# Altium PCB HBridgeMainBoard - Copy.PcbDoc (part 2 of 2)
Units mm, origin at the board's own origin, x right, y up, seen from the top; angles counter-clockwise.
Board outline 100 x 100 mm, 2 copper layers (Top Layer, Bottom Layer); 114 components, 99 nets, 368 pads, 0 vias.
Unrouted connection lines stored in the file: 258.
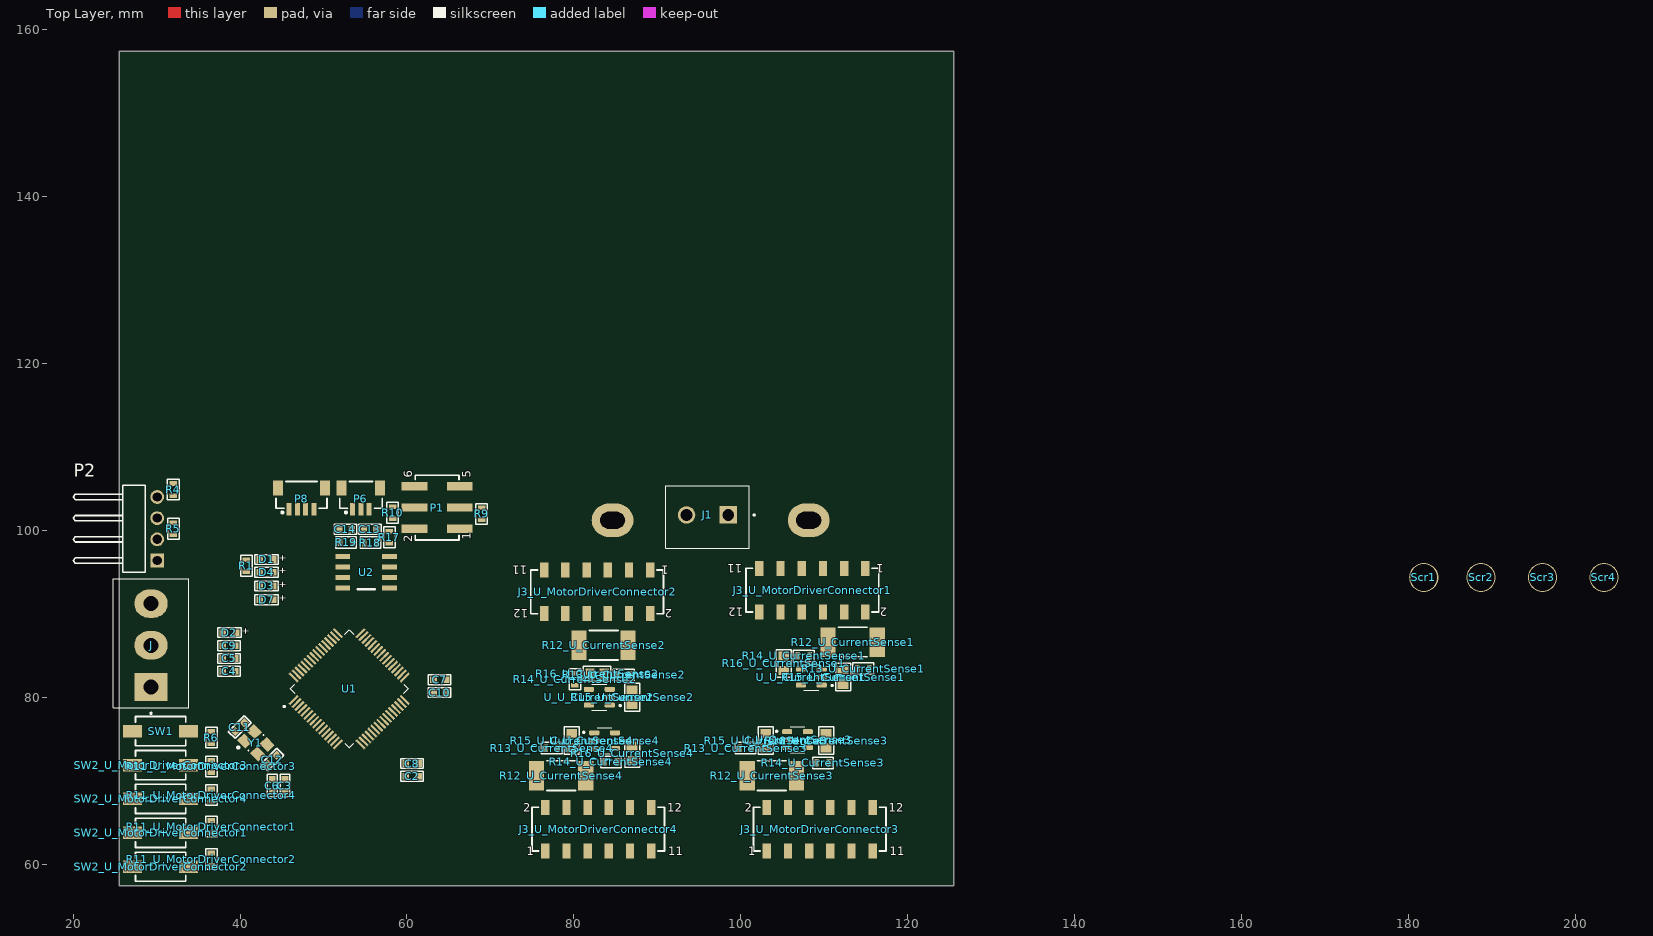
[diagram p0: Top Layer view]

## Part data (continued)
R13_U_CurrentSense1 R13_U_CurrentSense2 R13_U_CurrentSense3 R13_U_CurrentSense4 R14_U_CurrentSense1 R14_U_CurrentSense2 R14_U_CurrentSense3 R14_U_CurrentSense4: library part CMP-009-00278-1, "RES, size 0603, 2.2  KOhm, 1/4 W", Manufacture  Name=OEM, Rated Power="1/4 W", Resistance Tolerance=+/-1%, Component Type=Standard, ComponentLink1Description="Datasheet link", ComponentLink1URL=N/A, ComponentLink2Description="Supplier 1 URL", ComponentLink2URL=N/A, ComponentLink3Description="Supplier 2 URL", ComponentLink3URL=https://www.digikey.com/en/products/detail/yageo/RC0603FR-132K2L/13694214, ComponentLink4Description="Supplier 3 URL", ComponentLink4URL=N/A, Design Item ID=0006032221, Manufacture  SN=OEM, Mounting Technology=SMT, Pins=2, Size=0603, Source=Resistor_0603.SchLib, Supplier 1 Name=Mouser, Supplier 1 SN=603-SR0603FR-7T2K2L, Supplier 1 URL=https://www.mouser.vn/ProductDetail/YAGEO/SR0603FR-7T2K2L?qs=pfd5qewlna6SQQIuviAJZA%3D%3D, Supplier 2 Name=Digi-Key, Supplier 2 SN=13-RC0603FR-132K2LTR-ND, Supplier 2 URL=https://www.digikey.com/en/products/detail/yageo/RC0603FR-132K2L/13694214, Supplier 3 Name=thegioiic, Supplier 3 SN=N/A, Supplier 3 URL=N/A
R15_U_CurrentSense1 R15_U_CurrentSense2 R15_U_CurrentSense3 R15_U_CurrentSense4 R16_U_CurrentSense1 R16_U_CurrentSense2 R16_U_CurrentSense3 R16_U_CurrentSense4: library part CMP-009-00639-1, "RES, size 0805, 68 KOhm, 1/8W", Manufacture  Name=N/A, Rated Power="1/8 W", Resistance Tolerance=+/-1%, Component Type=Standard, ComponentLink1Description="Datasheet link", ComponentLink1URL=N/A, ComponentLink2Description="Supplier 1 URL", ComponentLink2URL=https://www.mouser.vn/ProductDetail/Vishay-Dale/CRCW080568K0JNTA?qs=nQS51YdobUZaOBJTD9nqEw%3D%3D, ComponentLink3Description="Supplier 2 URL", ComponentLink3URL=https://www.digikey.com/en/products/detail/yageo/RC0805JR-0768KL/728364, ComponentLink4Description="Supplier 3 URL", ComponentLink4URL=N/A, Design Item ID=0008056835, Manufacture  SN=N/A, Mounting Technology=SMT, Pins=2, Size=0805, Source=Resistor_0805.SchLib, Supplier 1 Name=Mouser, Supplier 1 SN=71-CRCW0805J-68K, Supplier 1 URL=https://www.mouser.vn/ProductDetail/Vishay-Dale/CRCW080568K0JNTA?qs=nQS51YdobUZaOBJTD9nqEw%3D%3D, Supplier 2 Name=Digi-Key, Supplier 2 SN=311-68KARTR-ND, Supplier 2 URL=https://www.digikey.com/en/products/detail/yageo/RC0805JR-0768KL/728364, Supplier 3 Name=Thegioiic, Supplier 3 SN=N/A, Supplier 3 URL=N/A
R18: library part CMP-009-00207-1, "RES, size 0603, 120 Ohm, 1/4 W", Manufacture  Name=OEM, Rated Power="1/4 W", Resistance Tolerance=+/-1%, Component Type=Standard, ComponentLink1Description="Datasheet link", ComponentLink1URL=https://www.yageo.com/upload/media/product/productsearch/datasheet/rchip/PYu-SR_20105_RoHS_L_10.pdf, ComponentLink2Description="Supplier 1 URL", ComponentLink2URL=N/A, ComponentLink3Description="Supplier 2 URL", ComponentLink3URL=https://www.digikey.com/en/products/detail/yageo/SR0603FR-7T120RL/9373099, ComponentLink4Description="Supplier 3 URL", ComponentLink4URL=N/A, Design Item ID=0006031211, Manufacture  SN=OEM, Mounting Technology=SMT, Pins=2, Size=0603, Source=Resistor_0603.SchLib, Supplier 1 Name=Mouser, Supplier 1 SN=603-SR0603FR-7T120RL, Supplier 1 URL=https://www.mouser.vn/ProductDetail/YAGEO/SR0603FR-7T120RL?qs=sGAEpiMZZMvdGkrng054tz1y1XEHv7sNpzSbq0ZWZmOggb8s%252BZMxlg%3D%3D, Supplier 2 Name=Digi-Key, Supplier 2 SN="YAG5825TR-ND YAG5825CT-ND YAG5825DKR-ND", Supplier 2 URL=https://www.digikey.com/en/products/detail/yageo/SR0603FR-7T120RL/9373099, Supplier 3 Name=thegioiic, Supplier 3 SN=N/A, Supplier 3 URL=N/A
R21_U_Protect1 R21_U_Protect2 R22_U_Protect1 R22_U_Protect2 R23_U_Protect1 R23_U_Protect2: library part CMP-009-00482-1, "RES, size 0805, 10 KOhm, 1/8 W", Manufacture  Name="Vishay Dale", Manufacture  SN=CRCW080515K0FKEAC, Rated Power="1/8 W", Resistance Tolerance=+/-1%, Component Type=Standard, ComponentLink1Description="Datasheet link", ComponentLink1URL=https://www.vishay.com/docs/28773/crcwce3.pdf, ComponentLink2Description="Supplier 1 URL", ComponentLink2URL=https://www.mouser.vn/ProductDetail/Vishay-Dale/CRCW080515K0FKEA?qs=bMjB6bAaLEM4rXT2DoR3BA%3D%3D, ComponentLink3Description="Supplier 2 URL", ComponentLink3URL=https://www.digikey.com/en/products/detail/vishay-dale/CRCW080515K0FKEAC/7928558, ComponentLink4Description="Supplier 3 URL", ComponentLink4URL=N/A, Design Item ID=0008051531, Mounting Technology=SMT, Pins=2, Size=0805, Source=Resistor_0805.SchLib, Supplier 1 Name=Mouser, Supplier 1 SN=71-CRCW0805-15K-E3, Supplier 1 URL=https://www.mouser.vn/ProductDetail/Vishay-Dale/CRCW080515K0FKEA?qs=bMjB6bAaLEM4rXT2DoR3BA%3D%3D, Supplier 2 Name=Digi-Key, Supplier 2 SN=541-4136-2-ND, Supplier 2 URL=https://www.digikey.com/en/products/detail/vishay-dale/CRCW080515K0FKEAC/7928558, Supplier 3 Name=Thegioiic, Supplier 3 SN=N/A, Supplier 3 URL=N/A
Scr1 Scr2 Scr3 Scr4: library part CMP-143-000000-1, Component Type=Standard, Design Item ID=MP3.2, Pin Count=1, Source=MP_3P2.SchLib
SW1 SW2_U_MotorDriverConnector1 SW2_U_MotorDriverConnector2 SW2_U_MotorDriverConnector3 SW2_U_MotorDriverConnector4: library part CMP-011-00107-1, "WS-TASV SMT Tact Switch, L6 x W3.5 x H4.3mm, 260g, SPST-NO, 12V, 50mA", Manufacturer="Wurth Elektronik", Operating Temperature Max=85°C, Operating Temperature Min=-40°C, Rated Current=50mA, Rated Voltage=12VDC, Category="Tact Switches", Circuit=SPST-NO, Component Type=Standard, Contact Material="Stainless Steel", Design Item ID=434111043826, Height=4.3mm, Length=6mm, Manufacturer Part Number=434111043826, Match Code=WS-TASV, Mount="Surface Mount", Operation Force=260g, Packaging="Tape and Reel", Pins=2, Source=Button.SchLib, Supplier 1 Name=Mouser, Supplier 1 SN=710-434111043826, Supplier 1 URL=https://www.mouser.vn/ProductDetail/Wurth-Elektronik/434111043826?qs=wr8lucFkNMW3koBfPj4qpQ%3D%3D, Supplier 2 Name=Digi-Key, Supplier 2 SN=732-7040-2-ND, Supplier 2 URL=https://www.digikey.com/en/products/detail/w%C3%BCrth-elektronik/434111043826/5209073, Supplier 3 Name=Thegioiic, Supplier 3 SN=N/A, Supplier 3 URL=N/A, Terminal Material="Copper Alloy", Terminal Plating=Silver, Washable=No, Width=3.5mm
U1: library part CMP-031-00016-5, "ARMÂ® CortexÂ®-M3 STM32F1 Microcontroller IC 32-Bit 72MHz 256KB (256K x 8) FLASH 64-LQFP (10x10)", Case/Package="LQFP-64 STMicroelectronics", Availability="In Stock", Check_prices=https://www.snapeda.com/parts/STM32F103RCT6/STMicroelectronics/view-part/?ref=eda, Component Type=Standard, Design Item ID=STM32F103RCT6, MF=STMicroelectronics, MP=STM32F103RCT6, Pins=64, Price=None, Purchase-URL=https://pricing.snapeda.com/search/part/STM32F103RCT6/?ref=eda, SnapEDA_Link=https://www.snapeda.com/parts/STM32F103RCT6/STMicroelectronics/view-part/?ref=snap, Source=STM32F103RCT6.SchLib
U2: library part CMP-016-000000-1, "1/1 Transceiver Half CANbus 8-SO", Package="SOIC-8 NXP Semiconductors", Availability="In Stock", Check_prices=https://www.snapeda.com/parts/TJA1050/NXP%20USA%20Inc./view-part/562764/?ref=eda, Design Item ID=TJA1050, MF="NXP USA", MP=TJA1050, Price=None, Purchase-URL=https://pricing.snapeda.com/search/part/TJA1050/?ref=eda, SnapEDA_Link=https://www.snapeda.com/parts/TJA1050/NXP%20USA%20Inc./view-part/562764/?ref=snap, Source=TJA1050.SchLib
U3: library part CMP-098-000070-1, "AMS1117-3.3V, OUT 3.3V 1A.", Current Input Maximum=N/A, Current Output Maximum=1A, Manufacturer=AMS, Voltage Input Maximum=15V, Voltage Output=3.3V, Component Type=Standard, ComponentLink1Description="Datasheet link", ComponentLink1URL=http://www.advanced-monolithic.com/pdf/ds1117.pdf, ComponentLink2Description="Supplier 1 URL", ComponentLink2URL=N/A, ComponentLink3Description="Supplier 2 URL", ComponentLink3URL=N/A, ComponentLink4Description="Supplier 3 URL", ComponentLink4URL=N/A, Design Item ID=AMS1117-3.3V, Manufacturer Part Number=N/A, Mounting Technology=SMD, Pad Count=4, Pin Count=4, Source=AMS_family.SchLib, Supplier 1 Name=Mouser, Supplier 1 SN=N/A, Supplier 1 URL=N/A, Supplier 2 Name=Digi-Key, Supplier 2 SN=N/A, Supplier 2 URL=N/A, Supplier 3 Name=thegioiic, Supplier 3 SN=N/A, Supplier 3 URL=https://www.thegioiic.com/ams1117-3-3v-ic-on-ap-3-3v-1a-sot-223
U_U_CurrentSense1 U_U_CurrentSense2 U_U_CurrentSense3 U_U_CurrentSense4: library part CMP-014-00080-5, "General Purpose Amplifier 1 Circuit Rail-to-Rail SOT-23-5", Case/Package="SOT-23 Microchip", Availability=Unavailable, Component Type=Standard, Design Item ID=MCP601T-I/OT, MF=Microchip, MP=MCP601T-I/OT, Pins=5, Price=None, SnapEDA_Link=https://www.snapeda.com/parts/MCP601T-I/OT/Microchip/view-part/43729/?ref=snap, Source=SnapEDAsch.SchLib
Y1: library part CMP-003-00057-1, "CRYSTAL 8.000MHZ 8PF SMD", Case/Package=NX3225SA, Frequency=25MHz, Load Capacitance=8pF, Manufacturer=NDK, Manufacturer Part Number=NX3225SA-25.000M-STD-CRS-2, Temperature="-40°C to +125°C", Temperature Range High=125°C, Temperature Range Low=-40°C, Tolerance=15ppm, Automotive=Yes, Automotive Grade="Grade 1", Category=Crys, Component Type=Standard, Design Item ID=CMP-200220-000002-1, Device Class L1="Passive Components", Device Class L2="Crystals / Oscillators", Device Class L3=Crystals, Digikey Description="CRYSTAL 25.0000MHZ 8PF SMD", Esr=100, Height=0.6mm, Lead Free=Yes, Octopart=https://octopart.com/nx3225sa-25.000m-std-crs-2-ndk-51374293, Pins=4, RoHS=TRUE, Series=NX3225SA, Source="Components - 28.03.25 - 23.15.SchLib"

## Nets (pads, with @x,y where several pads share a name; then routed paths per layer and width w, separated by ;. In a path a pad name is that pad's centre, name@x,y a point inside that pad or via, vN(x,y) a via of type N, cw(c..) or ccw(c..) an arc to the next point about the centre after c; other vN are vias at no path point)
3V3: C2.2 C3.2 C4.2 C5.2 C6.2 C7.2 C8.2 C9.2 C10.2 F4.1 J3_U_MotorDriverConnector1.2 J3_U_MotorDriverConnector2.2 J3_U_MotorDriverConnector3.2 J3_U_MotorDriverConnector4.2 P1.1 P1.2 P2.1 R2.2 R4.2 R5.2 R6.2 SW2_U_MotorDriverConnector1.2 SW2_U_MotorDriverConnector2.2 SW2_U_MotorDriverConnector3.2 SW2_U_MotorDriverConnector4.2 U1.13 U1.19 U1.32 U1.64
5V: C15.1 D5.A F3.0 J.2
5V_U_CurrentSense1: F3.1 U2.3 U_U_CurrentSense1.5 U_U_CurrentSense2.5 U_U_CurrentSense3.5 U_U_CurrentSense4.5
BOOT0: R9.1 U1.28
BOOT1: R10.1 U1.60
CAN_RX: U1.45 U2.4
CAN_TX: U1.44 U2.1
EN1_U_MotorDriverConnector1: J3_U_MotorDriverConnector1.7 U1.37
EN1_U_MotorDriverConnector2: J3_U_MotorDriverConnector2.7 U1.57
EN1_U_MotorDriverConnector3: J3_U_MotorDriverConnector3.7 U1.24
EN1_U_MotorDriverConnector4: J3_U_MotorDriverConnector4.7 U1.20
EN2_U_MotorDriverConnector1: J3_U_MotorDriverConnector1.5 U1.38
EN2_U_MotorDriverConnector2: J3_U_MotorDriverConnector2.5 U1.56
EN2_U_MotorDriverConnector3: J3_U_MotorDriverConnector3.5 U1.25
EN2_U_MotorDriverConnector4: J3_U_MotorDriverConnector4.5 U1.21
ENC_C1_U_MotorDriverConnector1: J3_U_MotorDriverConnector1.3 U1.41
ENC_C1_U_MotorDriverConnector2: J3_U_MotorDriverConnector2.3 U1.58
ENC_C1_U_MotorDriverConnector3: J3_U_MotorDriverConnector3.3 U1.22
ENC_C1_U_MotorDriverConnector4: J3_U_MotorDriverConnector4.3 U1.15
ENC_C2_U_MotorDriverConnector1: J3_U_MotorDriverConnector1.1 U1.42
ENC_C2_U_MotorDriverConnector2: J3_U_MotorDriverConnector2.1 U1.59
ENC_C2_U_MotorDriverConnector3: J3_U_MotorDriverConnector3.1 U1.23
ENC_C2_U_MotorDriverConnector4: J3_U_MotorDriverConnector4.1 U1.14
GND_U_Protect1: C1.1 C2.1 C3.1 C4.1 C5.1 C6.1 C7.1 C8.1 C9.1 C10.1 C11.1 C12.1 C13.1 C14.1 C15.2 C16.2 C17_U_Protect1.1 D3.1 D4.1 D7.1 D10_U_Protect1.C D11_U_Protect1.A J3_U_MotorDriverConnector1.8 J3_U_MotorDriverConnector2.8 J3_U_MotorDriverConnector3.8 J3_U_MotorDriverConnector4.8 J.1 P1.5 P1.6 P2.2 P6.3 P8.4 R1.1 R7.1 R8.1 R11_U_MotorDriverConnector1.1 R11_U_MotorDriverConnector2.1 R11_U_MotorDriverConnector3.1 R11_U_MotorDriverConnector4.1 R16_U_CurrentSense1.1 R16_U_CurrentSense2.1 R16_U_CurrentSense3.1 R16_U_CurrentSense4.1 R22_U_Protect1.1 R23_U_Protect1.1 SW1.1 U1.12 U1.18 U1.31 U1.47 U1.63 U2.2 U2.8 U3.1 U_U_CurrentSense1.2 U_U_CurrentSense2.2 U_U_CurrentSense3.2 U_U_CurrentSense4.2 Y1.2 Y1.4
GND_U_Protect2: C17.1 D10_U_Protect2.C D11_U_Protect2.A J1.1 J3_U_MotorDriverConnector1.10 J3_U_MotorDriverConnector1.12 J3_U_MotorDriverConnector2.10 J3_U_MotorDriverConnector2.12 J3_U_MotorDriverConnector3.10 J3_U_MotorDriverConnector3.12 J3_U_MotorDriverConnector4.10 J3_U_MotorDriverConnector4.12 R22_U_Protect2.1 R23_U_Protect2.1
NetC13_2: C13.2 P6.1 R17.2
NetC14_2: C14.2 P6.2 R19.2
NetC16_1: C16.1 D6.A R20.2 U3.2 U3.4
NetD1_1: D1.1 D2.1 R1.2
NetD3_2: D3.2 R2.1
NetD4_2: D4.2 R3.1
NetD5_K: D5.K U3.3
NetD7_2: D7.2 R20.1
NetD8_U_Protect1_A: D8_U_Protect1.A D10_U_Protect1.A
NetD8_U_Protect2_A: D8_U_Protect2.A D10_U_Protect2.A
NetD9_U_Protect1_A: D9_U_Protect1.A Q1_U_Protect1.1 R22_U_Protect1.2
NetD9_U_Protect1_K: D9_U_Protect1.K Q1_U_Protect1.2 Q2_U_Protect1.2 Q3_U_Protect1.2 R21_U_Protect1.2
NetD9_U_Protect2_A: D9_U_Protect2.A Q1_U_Protect2.1 R22_U_Protect2.2
NetD9_U_Protect2_K: D9_U_Protect2.K Q1_U_Protect2.2 Q2_U_Protect2.2 Q3_U_Protect2.2 R21_U_Protect2.2
NetD11_U_Protect1_K: D11_U_Protect1.K Q3_U_Protect1.1 R21_U_Protect1.1
NetD11_U_Protect2_K: D11_U_Protect2.K Q3_U_Protect2.1 R21_U_Protect2.1
NetP1_3: P1.3 R9.2
NetP1_4: P1.4 R10.2
NetP2_3: P2.3 R5.1 R8.2 U1.46
NetP2_4: P2.4 R4.1 R7.2 U1.49
NetQ2_U_Protect1_1: Q2_U_Protect1.1 Q3_U_Protect1.3 R23_U_Protect1.2
NetQ2_U_Protect2_1: Q2_U_Protect2.1 Q3_U_Protect2.3 R23_U_Protect2.2
NetR13_U_CurrentSense1_1: R13_U_CurrentSense1.1 R15_U_CurrentSense1.2 U_U_CurrentSense1.3
NetR13_U_CurrentSense2_1: R13_U_CurrentSense2.1 R15_U_CurrentSense2.2 U_U_CurrentSense2.3
NetR13_U_CurrentSense3_1: R13_U_CurrentSense3.1 R15_U_CurrentSense3.2 U_U_CurrentSense3.3
NetR13_U_CurrentSense4_1: R13_U_CurrentSense4.1 R15_U_CurrentSense4.2 U_U_CurrentSense4.3
NetR14_U_CurrentSense1_1: R14_U_CurrentSense1.1 R16_U_CurrentSense1.2 U_U_CurrentSense1.4
NetR14_U_CurrentSense2_1: R14_U_CurrentSense2.1 R16_U_CurrentSense2.2 U_U_CurrentSense2.4
NetR14_U_CurrentSense3_1: R14_U_CurrentSense3.1 R16_U_CurrentSense3.2 U_U_CurrentSense3.4
NetR14_U_CurrentSense4_1: R14_U_CurrentSense4.1 R16_U_CurrentSense4.2 U_U_CurrentSense4.4
NetR17_1: R17.1 R18.2 U2.7
NetR18_1: R18.1 R19.1 U2.6
OSC_IN: C11.2 U1.5 Y1.1
OSC_OUT: C12.2 U1.6 Y1.3
PA2: J3_U_MotorDriverConnector4.9 U1.16
PA3: J3_U_MotorDriverConnector4.11 U1.17
PA10: U1.43
PA15: U1.50
PB0: J3_U_MotorDriverConnector3.11 U1.26
PB1: J3_U_MotorDriverConnector3.9 U1.27
PB3: U1.55
PB8: J3_U_MotorDriverConnector2.9 U1.61
PB9: J3_U_MotorDriverConnector2.11 U1.62
PB10: R11_U_MotorDriverConnector4.2 SW2_U_MotorDriverConnector4.1 U1.29
PB11: R11_U_MotorDriverConnector3.2 SW2_U_MotorDriverConnector3.1 U1.30
PB12: R11_U_MotorDriverConnector1.2 SW2_U_MotorDriverConnector1.1 U1.33
PB13: R11_U_MotorDriverConnector2.2 SW2_U_MotorDriverConnector2.1 U1.34
PB14: D1.2 U1.35
PB15: D2.2 U1.36
PC0: R15_U_CurrentSense4.1 U1.8 U_U_CurrentSense4.1
PC1: R15_U_CurrentSense2.1 U1.9 U_U_CurrentSense2.1
PC2: R15_U_CurrentSense3.1 U1.10 U_U_CurrentSense3.1
PC3: R15_U_CurrentSense1.1 U1.11 U_U_CurrentSense1.1
PC8: J3_U_MotorDriverConnector1.11 U1.39
PC9: J3_U_MotorDriverConnector1.9 U1.40
PC10: P8.3 U1.51
PC11: P8.2 U1.52
PC12: P8.1 U1.53
PC13: U1.2
PC14: U1.3
PC15: R3.2 U1.4
PD2: U1.54
POWER3V3: D6.K F4.0
RESET: C1.2 R6.1 SW1.2 U1.7
VCC: F2.0 J.3
VCC_U_MotorDriverConnector1: J3_U_MotorDriverConnector1.4 J3_U_MotorDriverConnector2.4 J3_U_MotorDriverConnector3.4 J3_U_MotorDriverConnector4.4 Q2_U_Protect1.3
VDC: F1.0 J1.2
VDC_U_MotorDriverConnector1: J3_U_MotorDriverConnector1.6 R12_U_CurrentSense1.2 R14_U_CurrentSense1.2
VDC_U_MotorDriverConnector2: J3_U_MotorDriverConnector2.6 R12_U_CurrentSense2.2 R14_U_CurrentSense2.2
VDC_U_MotorDriverConnector3: J3_U_MotorDriverConnector3.6 R12_U_CurrentSense3.2 R14_U_CurrentSense3.2
VDC_U_MotorDriverConnector4: J3_U_MotorDriverConnector4.6 R12_U_CurrentSense4.2 R14_U_CurrentSense4.2
VDCIn_U_CurrentSense1: Q2_U_Protect2.3 R12_U_CurrentSense1.1 R12_U_CurrentSense2.1 R12_U_CurrentSense3.1 R12_U_CurrentSense4.1 R13_U_CurrentSense1.2 R13_U_CurrentSense2.2 R13_U_CurrentSense3.2 R13_U_CurrentSense4.2
Vin_U_Protect1: C17_U_Protect1.2 D8_U_Protect1.C F2.1 Q1_U_Protect1.3
Vin_U_Protect2: C17.2 D8_U_Protect2.C F1.1 Q1_U_Protect2.3
pads on no net: P6.MP1 P6.MP2 P8.MP1 P8.MP2 Scr1.1 Scr2.1 Scr3.1 Scr4.1 U1.1 U1.48 U2.5

## Silkscreen, mask and mechanical layers (free items; w line width, h text height)
Drill Guide:
  the board outline again, w0.254

## Text inside footprints (layer, text, board x,y; h text height)
C15: Bottom Overlay "+" at 36.203,78.584 h1.22 r270
C16: Bottom Overlay "+" at 37.203,87.532 h1.22 r90
D1: Top Overlay "+" at 45.466,96.266 h0.76 r90
D2: Top Overlay "+" at 41.021,87.503 h0.76 r90
D3: Top Overlay "+" at 45.466,93.091 h0.76 r90
D4: Top Overlay "+" at 45.466,94.742 h0.76 r90
D7: Top Overlay "+" at 45.466,91.44 h0.76 r90
J3_U_MotorDriverConnector1: Top Overlay "2" at 117.565,90.737 h1.02 r180; Top Overlay "1" at 117.165,95.937 h1.02 r180; Top Overlay "11" at 100.205,95.937 h1.02 r180; Top Overlay "12" at 100.305,90.737 h1.02 r180
J3_U_MotorDriverConnector2: Top Overlay "2" at 91.784,90.543 h1.02 r180; Top Overlay "1" at 91.384,95.743 h1.02 r180; Top Overlay "11" at 74.424,95.743 h1.02 r180; Top Overlay "12" at 74.524,90.543 h1.02 r180
J3_U_MotorDriverConnector3: Top Overlay "2" at 100.494,66.302 h1.02; Top Overlay "1" at 100.894,61.102 h1.02; Top Overlay "11" at 117.854,61.102 h1.02; Top Overlay "12" at 117.754,66.302 h1.02
J3_U_MotorDriverConnector4: Top Overlay "2" at 73.951,66.302 h1.02; Top Overlay "1" at 74.351,61.102 h1.02; Top Overlay "11" at 91.311,61.102 h1.02; Top Overlay "12" at 91.211,66.302 h1.02
P1: Top Overlay "2" at 60.627,98.573 h1.02 r90; Top Overlay "1" at 67.627,98.873 h1.02 r90; Top Overlay "5" at 67.627,106.313 h1.02 r90; Top Overlay "6" at 60.627,106.313 h1.02 r90